# Altium PCB RockRTK.PcbDoc (part 6 of 8)
Units mm, origin at the board's own origin, x right, y up, seen from the top; angles counter-clockwise.
Board outline 128 x 72 mm, 6 copper layers (Top Layer, MidLayer1GND, MidLayer2SIG, MidLayer3PWR, MidLayer4GND, Bottom Layer), stack 1.538 mm thick; 400 components, 307 nets, 1795 pads, 1243 vias.
Unrouted connection lines stored in the file: 522.
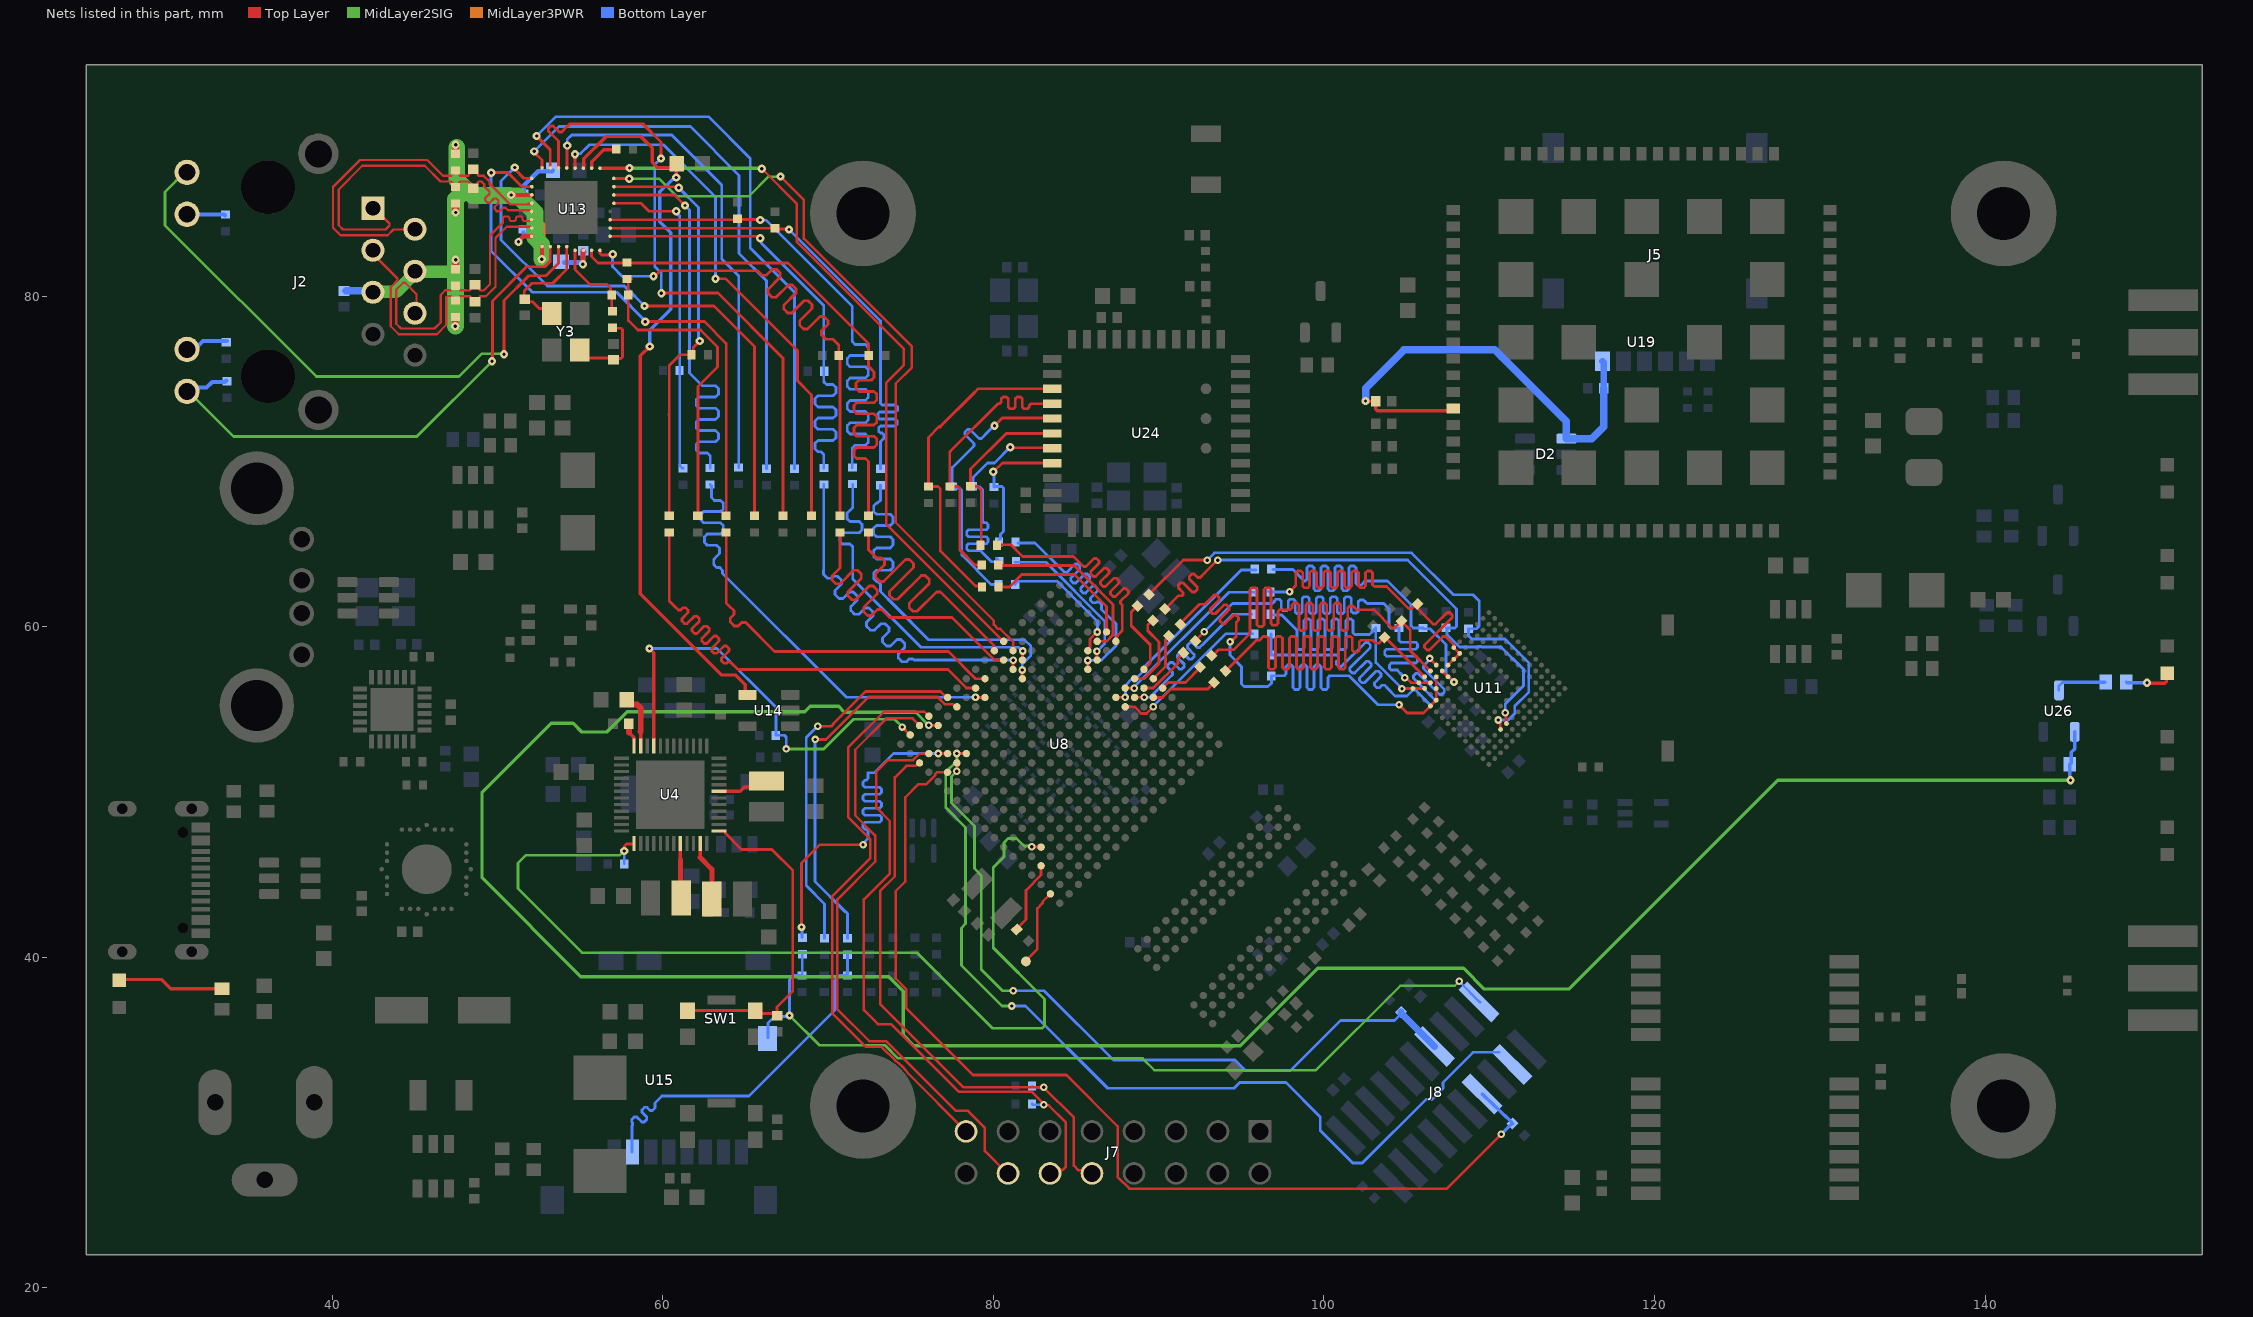
[diagram p9: the nets of this part, all layers, seen from the top]

## Via types
v1: diameter 0.5, hole 0.2, Top Layer to Bottom Layer, tented both sides, 532 vias
v2: diameter 0.457, hole 0.203, Top Layer to Bottom Layer, tented both sides, 414 vias
v3: diameter 0.5, hole 0.2, Top Layer to Bottom Layer, 233 vias
v4: diameter 0.7, hole 0.3, Top Layer to Bottom Layer, 32 vias
v5: diameter 0.457, hole 0.2, Top Layer to Bottom Layer, tented both sides, 30 vias
v6: diameter 0.7, hole 0.3, Top Layer to Bottom Layer, tented both sides, 2 vias

## Nets (pads, with @x,y where several pads share a name; then routed paths per layer and width w, separated by ;. In a path a pad name is that pad's centre, name@x,y a point inside that pad or via, vN(x,y) a via of type N, cw(c..) or ccw(c..) an arc to the next point about the centre after c; other vN are vias at no path point) (continued)
MMC0_DAT2_R: R126.1 U8.F18 | length 22.5
  Top Layer w0.169: v2(69.375,53.975) 70.198,53.975 70.34,54.118 70.34,54.14 72.275,56.075 76.802,56.075 77.162,55.715 U8.F18@77.238,55.715
  Bottom Layer w0.169: v2(69.375,53.975) 68.687,53.287 68.687,44.338 69.8,43.225 R126.1@69.8,41.15
MMC0_DAT3: R85.1 R128.2 U15.2 | length 22.3
  Bottom Layer w0.169: U15.2@58.15,28.217 58.15,29.75 58.15,29.8 58.185,29.835 58.185,29.985 58.136,30.034 58.136,30.183 58.285,30.333 58.435,30.333 58.74,30.028 58.89,30.028 59.04,30.177 59.04,30.327 58.748,30.619 58.748,30.768 58.898,30.918 59.047,30.918 59.232,30.733 59.382,30.733 59.532,30.882 59.532,31.032 59.532,31.182 59.837,31.487 59.95,31.6 65.225,31.6 70.4,36.775 70.4,38.6 70.7,38.9 R85.1@71.175,38.9 ; R85.1@71.15,39.05 R85.1@71.2,39 ; R85.1@71.175,39 R128.2@71.175,40.15
MMC0_DAT3_R: R128.1 U8.F17 | length 22.7
  Top Layer w0.169: v2(69.225,53.175) 69.875,53.175 72.45,55.75 76.64,55.75 77.09,55.3 77.577,55.3 77.728,55.15 U8.F17@77.804,55.15
  Bottom Layer w0.169: v2(69.225,53.175) 69.225,44.575 71.05,42.75 71.075,42.75 71.175,42.65 R128.1@71.175,41.15
MMC0_SDCD: J8.19 R88.1 R135.2 U15.DL | length 52.7
  MidLayer2SIG w0.152: 89.029,33.884 89.74,33.172 99.522,33.172 104.625,38.275 107.919,38.275 v2(108.181,38.537)
  MidLayer2SIG w0.169: v2(67.675,36.475) 69.479,34.671 73.457,34.671 74.244,33.884 89.029,33.884
  Bottom Layer w0.152: v2@108.131,38.587 J8.19@109.455,37.263
  Bottom Layer w0.169: U15.DL@66.375,35.125 66.38,35.13 66.38,36.03 66.77,36.42 67.62,36.42 v2(67.675,36.475) 67.675,38.65 67.925,38.9 R88.1@68.425,38.9 ; R88.1@68.45,38.85 R135.2@68.45,40.175
MMC0_SDCD_R: R135.1 U8.C15 | length 24.7
  Top Layer w0.169: v2(68.4,41.825) 68.4,45.7 69.5,46.8 v2(72.125,46.8) ; v2@76.68,52.32 U8.C15@77.246,52.32
  Bottom Layer w0.169: R135.1@68.425,41.2 v2@68.425,41.85 ; v2(72.125,46.8) 72.125,46.878 72.425,47.178 72.425,47.55 72.425,47.635 72.319,47.74 72.235,47.74 72.129,47.846 72.129,48.058 72.235,48.164 73.13,48.164 73.236,48.27 73.236,48.481 73.13,48.587 72.235,48.587 72.129,48.693 72.129,48.905 72.235,49.01 73.13,49.01 73.236,49.116 73.236,49.328 73.13,49.434 72.235,49.434 72.129,49.539 72.129,49.751 72.235,49.857 73.13,49.857 73.236,49.963 73.236,50.174 73.13,50.28 72.235,50.28 72.129,50.386 72.129,50.598 72.235,50.703 72.319,50.703 72.425,50.809 72.425,51.125 72.425,51.165 72.815,51.165 73.975,52.325 v2(76.675,52.325)
MMC1_CLK: R53.1 R138.1 U11.M6 | length 33.9
  Top Layer w0.169: R138.1@90.479,61.154 91.187,61.862 91.412,61.862 91.472,61.922 91.472,62.072 91.191,62.354 91.191,62.503 91.34,62.653 91.49,62.653 92.04,62.103 92.19,62.103 92.339,62.253 92.339,62.402 91.857,62.885 91.857,63.035 92.006,63.184 92.156,63.184 92.37,62.97 92.52,62.97 92.79,63.24 v2(93.575,64.025) ; v2(110.975,54.8) 111.023,54.752 U11.M6@111.023,54.107
  Bottom Layer w0.169: v2(93.575,64.025) 105.07,64.025 108.025,61.07 108.025,60.024 107.926,59.925 R53.1@107.4,59.925 107.455,59.87 107.455,59.52 108.2,58.775 109.352,58.775 109.371,58.794 109.515,58.794 109.534,58.775 110.725,58.775 112.075,57.425 112.075,56.425 110.975,55.325 v2(110.975,54.8)
MMC1_CLK_R: R138.2 U8.U9 | length 4.9
  Top Layer w0.169: U8.U9@88.625,56.925 88.625,56.903 88.681,56.847 89.115,56.847 90.025,57.757 90.025,59.075 89.35,59.75 89.35,60.1 R138.2@89.7,60.45
MMC1_CMD: R54.1 R136.1 U11.M5 | length 34.2
  Top Layer w0.169: R136.1@89.529,62.054 91.5,64.025 v2(92.95,64.025) ; v2(110.55,54.35) 110.55,54.272 110.67,54.152 110.67,53.837 U11.M5@110.637,53.804
  Bottom Layer w0.169: v2(92.95,64.025) 93.325,64.4 93.327,64.4 93.393,64.465 105.31,64.465 107.85,61.925 109.025,61.925 109.4,61.55 109.4,60.05 109.225,59.875 R54.1@108.75,59.875 108.75,59.45 108.95,59.25 110.95,59.25 112.4,57.8 112.4,56.05 111.55,55.2 111.55,54.752 111.157,54.36 110.683,54.36 110.666,54.342 v2@110.666,54.278 ; v2@110.644,54.369 v2@110.675,54.4
MMC1_CMD_R: R136.2 U8.V9 | length 4.7
  Top Layer w0.169: R136.2@88.815,61.36 88.35,60.895 88.35,60.05 89.5,58.9 89.5,57.795 89.18,57.475 U8.V9@89.125,57.475
MMC1_DAT0: R62.1 R121.1 U11.A3 | length 37.7
  Top Layer w0.169: R121.1@94.2,57.45 95.925,59.175 96.031,59.175 96.116,59.175 96.222,59.281 96.222,59.299 96.328,59.405 96.539,59.405 96.645,59.299 96.645,57.527 96.751,57.421 96.962,57.421 97.068,57.527 97.068,59.299 97.174,59.405 97.386,59.405 97.492,59.299 97.492,57.527 97.597,57.421 97.809,57.421 97.915,57.527 97.915,59.299 98.021,59.405 98.232,59.405 98.338,59.299 98.338,57.527 98.444,57.421 98.656,57.421 98.761,57.527 98.761,59.299 98.867,59.405 99.079,59.405 99.185,59.299 99.185,57.527 99.291,57.421 99.502,57.421 99.608,57.527 99.608,59.299 99.714,59.405 99.925,59.405 100.031,59.299 100.031,57.527 100.137,57.421 100.349,57.421 100.455,57.527 100.455,59.299 100.56,59.405 100.772,59.405 100.878,59.299 100.878,57.527 100.984,57.421 101.195,57.421 101.301,57.527 101.301,59.299 101.407,59.405 101.619,59.405 101.724,59.299 101.724,58.569 101.83,58.463 102.042,58.463 102.148,58.569 102.148,59.069 102.254,59.175 102.961,59.175 103.136,59 103.177,59 103.332,59 R62.1@103.679,59.346 103.714,59.346 U11.A3@106.097,56.964
MMC1_DAT0_R: R121.2 U8.U7 | length 4.1
  Top Layer w0.169: U8.U7@89.7,55.775 89.76,55.715 90.251,55.715 90.76,56.225 92.975,56.225 R121.2@93.375,56.625
MMC1_DAT1: R61.1 R123.1 U11.A4 | length 38.9
  Top Layer w0.169: R123.1@93.304,58.354 93.383,58.354 93.63,58.6 94.55,58.6 94.606,58.656 95.537,59.587 95.537,62.247 95.643,62.353 95.854,62.353 95.96,62.247 95.96,60.104 96.066,59.999 96.278,59.999 96.383,60.104 96.383,62.247 96.489,62.353 96.701,62.353 96.807,62.247 96.807,60.189 96.913,60.083 97.124,60.083 97.23,60.189 97.23,60.919 97.336,61.025 97.612,61.025 97.875,61.025 97.96,61.025 98.065,61.131 98.065,61.317 98.171,61.422 98.383,61.422 98.489,61.317 98.489,59.866 98.595,59.76 98.806,59.76 98.912,59.866 98.912,61.317 99.018,61.422 99.23,61.422 99.335,61.317 99.335,59.866 99.441,59.76 99.653,59.76 99.759,59.866 99.759,61.317 99.864,61.422 100.076,61.422 100.182,61.317 100.182,59.866 100.288,59.76 100.499,59.76 100.605,59.866 100.605,61.317 100.711,61.422 100.923,61.422 101.028,61.317 101.028,59.866 101.134,59.76 101.346,59.76 101.452,59.866 101.452,61.145 101.558,61.251 101.769,61.251 101.875,61.145 101.875,61.131 101.981,61.025 102.075,61.025 103.025,61.025 104.13,59.92 104.27,59.92 R61.1@104.7,60.35 104.7,60.315 105.225,59.79 105.225,58.543 106.443,57.325 U11.A4@106.45,57.325
MMC1_DAT1_R: R123.2 U8.V7 | length 2.6
  Top Layer w0.169: U8.V7@90.35,56.4 90.575,56.625 91.625,56.625 R123.2@92.525,57.525
MMC1_DAT2: R60.1 R125.1 U11.A5 | length 28.9
  Top Layer w0.169: v2(106.4,58.075) U11.A5@106.804,57.671
  Bottom Layer w0.169: R60.1@96.8,58.275 R125.1@96.8,59.55 ; R60.1@96.8,58.325 96.85,58.275 100.425,58.275 100.782,58.275 100.888,58.169 100.888,58.02 100.751,57.883 100.751,57.733 100.901,57.583 101.05,57.583 102.514,59.047 102.664,59.047 102.813,58.897 102.813,58.748 101.565,57.5 101.565,57.35 101.715,57.2 101.864,57.2 102.564,57.9 102.714,57.9 102.864,57.75 102.864,57.601 102.164,56.901 102.164,56.751 102.313,56.602 102.463,56.602 103.161,57.299 103.31,57.299 103.46,57.15 103.46,57 103.059,56.599 103.059,56.449 103.208,56.299 103.358,56.299 103.517,56.458 103.667,56.458 103.862,56.263 104.315,55.81 105.015,55.81 105.035,55.81 105.384,56.159 105.534,56.159 106.392,55.301 106.542,55.301 106.692,55.45 106.692,55.6 105.415,56.877 105.415,57.026 105.565,57.176 105.714,57.176 106.991,55.899 107.141,55.899 107.29,56.049 107.29,56.199 106.021,57.468 106.021,57.618 106.214,57.811 v2@106.453,58.05
MMC1_DAT2_R: R125.2 U8.R8 | length 9.9
  Top Layer w0.169: U8.R8@87.954,55.155 88.545,55.155 88.75,54.95 88.949,54.751 89.282,54.751 89.675,55.144 v2(89.675,55.15)
  Bottom Layer w0.169: v2(89.675,55.15) 89.675,55.175 94.075,59.575 R125.2@95.7,59.575
MMC1_DAT3: R59.1 R127.1 U11.A1 U11.B2 | length 26.6
  Top Layer w0.169: v2(104.725,56.25) 104.729,56.254 105.386,56.254 U11.A1@105.389,56.257 106.082,56.257 U11.B2@106.1,56.275
  Bottom Layer w0.169: R127.1@96.8,60.7 97.45,60.7 97.606,60.544 98.369,59.781 98.369,58.715 98.475,58.61 98.687,58.61 98.793,58.715 98.793,60.354 98.899,60.46 99.11,60.46 99.216,60.354 99.216,58.715 99.322,58.61 99.534,58.61 99.639,58.715 99.639,60.354 99.745,60.46 99.957,60.46 100.063,60.354 100.063,58.715 100.168,58.61 100.38,58.61 100.486,58.715 100.486,60.354 100.592,60.46 100.803,60.46 100.909,60.354 100.909,58.715 101.015,58.61 101.227,58.61 101.332,58.715 101.332,60.354 101.438,60.46 101.65,60.46 101.756,60.354 101.756,59.631 101.862,59.525 102.181,59.525 102.76,59.525 102.956,59.721 102.956,59.746 103.121,59.912 R59.1@103.146,59.912 103.146,57.829 104.631,56.344 104.631,56.181 v2@104.625,56.175
MMC1_DAT3_R: R127.2 U8.T8 | length 12.7
  Top Layer w0.169: U8.T8@88.554,55.73 v2@89.12,55.73
  Bottom Layer w0.169: v2(89.125,55.725) 89.475,55.725 90.782,57.032 90.842,57.092 90.842,57.242 90.557,57.527 90.557,57.676 90.707,57.826 90.856,57.826 91.257,57.426 91.406,57.426 91.556,57.576 91.556,57.725 91.156,58.125 91.156,58.275 91.305,58.425 91.455,58.425 91.855,58.024 92.005,58.024 92.155,58.174 92.155,58.324 91.754,58.724 91.754,58.874 91.904,59.023 92.054,59.023 92.339,58.738 92.488,58.738 92.737,58.987 94.5,60.75 R127.2@95.625,60.75
MMC1_DAT4: R58.1 R129.1 U11.A2 U11.B3 | length 36
  Top Layer w0.169: R129.1@92.329,59.229 92.329,59.254 v2(92.775,59.7) ; v2(104.9,56.9) 104.978,56.9 105.267,56.611 U11.A2@105.743,56.611 ; U11.A2@105.739,56.611 U11.B3@106.45,56.611 ; U11.B3@106.427,56.634 U11.B3@106.45,56.611 ; U11.B3@106.439,56.6 U11.B3@106.45,56.611
  Bottom Layer w0.169: v2(92.775,59.7) 94.475,61.4 96.81,61.4 96.895,61.4 97.001,61.506 97.001,61.546 97.106,61.651 97.318,61.651 97.424,61.546 97.424,61.064 97.53,60.958 97.741,60.958 97.847,61.064 97.847,61.554 97.953,61.66 98.165,61.66 98.27,61.554 98.27,60.883 98.376,60.777 98.588,60.777 98.694,60.883 98.694,61.703 98.8,61.809 99.011,61.809 99.117,61.703 99.117,60.883 99.223,60.777 99.435,60.777 99.54,60.883 99.54,61.703 99.646,61.809 99.858,61.809 99.964,61.703 99.964,60.883 100.069,60.777 100.281,60.777 100.387,60.883 100.387,61.703 100.493,61.809 100.704,61.809 100.81,61.703 100.81,60.883 100.916,60.777 101.128,60.777 101.234,60.883 101.234,61.703 101.339,61.809 101.551,61.809 101.657,61.703 101.657,60.927 101.763,60.821 101.974,60.821 102.08,60.927 102.08,61.506 102.186,61.612 102.398,61.612 102.503,61.506 102.609,61.4 102.75,61.4 103.625,61.4 103.95,61.075 103.95,60.025 104.075,59.9 R58.1@104.525,59.9 ; R58.1@104.546,59.912 104.546,59.425 104.546,59.166 104.652,59.06 105.562,59.06 105.668,58.955 105.668,58.743 105.562,58.637 103.789,58.637 103.683,58.531 103.683,58.32 103.789,58.214 105.562,58.214 105.668,58.108 105.668,57.896 105.562,57.791 104.079,57.791 103.973,57.685 103.973,57.473 104.079,57.367 104.44,57.367 104.546,57.261 104.546,57.254 104.623,57.177 v2(104.9,56.9)
MMC1_DAT4_R: R129.2 U8.U8 | length 3.5
  Top Layer w0.169: U8.U8@89.175,56.275 89.181,56.281 89.681,56.281 91.175,57.775 91.175,58.075 R129.2@91.575,58.475
MMC1_DAT5: R57.1 R131.1 U11.B4 U11.C3 U11.D1 U11.D2 | length 35.8
  Top Layer w0.169: R131.1@91.404,60.279 92.475,61.35 92.683,61.35 92.803,61.35 93.369,61.916 93.519,61.916 93.669,61.767 93.669,61.617 93.128,61.076 93.128,60.927 93.278,60.777 93.428,60.777 93.968,61.318 94.118,61.318 94.267,61.168 94.267,61.018 93.727,60.478 93.727,60.328 93.877,60.179 94.026,60.179 94.539,60.691 94.689,60.691 94.838,60.542 94.838,60.392 94.698,60.252 94.698,60.102 94.7,60.1 94.7,59.899 94.7,59.4 v2@94.4,59.1 ; v2(104.55,55.275) 105.045,54.78 106.034,54.78 U11.D1@106.45,55.196 U11.D2@106.804,55.55 ; U11.D2@106.8,55.525 106.804,55.529 U11.B4@106.804,56.964 ; U11.C3@106.8,56.225 U11.C3@106.804,56.229
  Bottom Layer w0.169: v2(94.325,59.075) 94.325,58.275 95.025,57.575 95.025,56.525 95.175,56.375 96.625,56.375 96.825,56.575 R57.1@96.825,57.025 97.525,57.025 97.61,57.025 97.715,57.131 97.715,57.582 97.821,57.688 98.033,57.688 98.139,57.582 98.139,56.311 98.245,56.205 98.456,56.205 98.562,56.311 98.562,57.582 98.668,57.688 98.88,57.688 98.985,57.582 98.985,56.311 99.091,56.205 99.303,56.205 99.409,56.311 99.409,57.582 99.514,57.688 99.726,57.688 99.832,57.582 99.832,56.311 99.938,56.205 100.149,56.205 100.255,56.311 100.255,56.919 100.361,57.025 100.875,57.025 ; 100.747,57.025 100.875,57.025 ; v2(104.55,55.275) 103.275,55.275 101.525,57.025 100.875,57.025
MMC1_DAT5_R: R131.2 U8.V8 | length 3.1
  Top Layer w0.169: U8.V8@89.725,56.875 89.725,56.889 90.425,57.589 90.425,59.225 R131.2@90.721,59.521
MMC1_DAT6: R56.1 R132.1 U11.B5 U11.C5 | length 26.7
  Top Layer w0.169: U11.B5@107.157,57.318 U11.C5@107.511,56.964 107.775,56.7 v2@107.8,56.7
  Bottom Layer w0.169: R132.1@96.925,63.45 98.125,63.45 98.786,62.789 98.823,62.752 98.871,62.752 98.977,62.858 98.977,63.562 99.082,63.668 99.294,63.668 99.4,63.562 99.4,62.275 99.506,62.17 99.717,62.17 99.823,62.275 99.823,63.562 99.929,63.668 100.141,63.668 100.246,63.562 100.246,62.275 100.352,62.17 100.564,62.17 100.67,62.275 100.67,63.562 100.775,63.668 100.987,63.668 101.093,63.562 101.093,62.275 101.199,62.17 101.41,62.17 101.516,62.275 101.516,63.562 101.622,63.668 101.834,63.668 101.94,63.562 101.94,62.613 102.045,62.507 102.257,62.507 102.363,62.613 102.363,62.647 102.469,62.752 103.35,62.752 103.85,62.752 105.275,61.327 105.275,60.05 105.413,59.912 R56.1@106.021,59.912 ; R56.1@105.996,59.912 106.034,59.874 106.426,59.874 107.39,58.91 107.39,57.135 v2(107.875,56.65)
MMC1_DAT6_R: R132.2 U8.R9 | length 12.2
  Top Layer w0.169: U8.R9@87.404,55.73 v2@87.97,55.73
  Bottom Layer w0.169: v2(87.975,55.725) 87.997,55.747 87.997,56.447 88.375,56.825 88.598,56.825 89.175,57.402 89.175,57.6 95,63.425 R132.2@95.9,63.425
MMC1_DAT7: R55.1 R134.1 U11.A8 U11.B6 U11.B7 U11.B8 | length 30.3
  Top Layer w0.169: v2(97.925,62.1) 98.104,62.279 98.295,62.47 98.295,63.264 98.4,63.369 98.612,63.369 98.718,63.264 98.718,62.453 98.824,62.347 99.035,62.347 99.141,62.453 99.141,63.264 99.247,63.369 99.459,63.369 99.565,63.264 99.565,62.453 99.67,62.347 99.882,62.347 99.988,62.453 99.988,63.264 100.094,63.369 100.305,63.369 100.411,63.264 100.411,62.453 100.517,62.347 100.729,62.347 100.834,62.453 100.834,63.264 100.94,63.369 101.152,63.369 101.258,63.264 101.258,62.453 101.364,62.347 101.575,62.347 101.681,62.453 101.681,63.264 101.787,63.369 101.998,63.369 102.104,63.264 102.104,62.453 102.21,62.347 102.422,62.347 102.528,62.453 102.528,63.264 102.633,63.369 102.845,63.369 102.951,63.264 102.951,62.531 103.057,62.425 103.287,62.425 103.8,62.425 105.125,61.1 105.332,61.1 R55.1@105.629,61.396 ; R55.1@105.654,61.371 105.636,61.354 105.636,61.12 106.24,60.515 106.3,60.456 106.607,60.149 106.757,60.149 107.467,60.859 107.617,60.859 107.766,60.709 107.766,60.559 106.096,58.889 106.096,58.74 106.246,58.59 106.396,58.59 107.206,59.4 107.356,59.4 107.415,59.34 107.841,58.915 107.841,58.769 U11.A8@107.864,58.746 ; U11.B6@107.511,57.671 107.839,58 U11.B7@107.875,58 ; U11.A8@107.85,58.746 U11.B8@108.218,58.378 ; U11.B7@107.864,58.025 108.189,58.35 U11.B8@108.225,58.35
  Bottom Layer w0.169: R134.1@96.625,62.15 96.675,62.1 v2(97.925,62.1)
MMC1_DAT7_R: R134.2 U8.T9 | length 10.3
  Top Layer w0.169: U8.T9@87.954,56.28 v2@88.52,56.28
  Bottom Layer w0.169: v2(88.525,56.275) 88.525,56.35 94.25,62.075 R134.2@95.775,62.075
MMC2_CLK: R111.1 R143.2 U24.17 | length 10.9
  Top Layer w0.169: R143.2@79.25,65.05 79.275,65.075 79.275,68.275 79.055,68.495 78.63,68.495 R111.1@78.625,68.5 78.625,69.525 80.786,71.686 U24.17@83.582,71.686
MMC2_CLK_R: R143.1 U8.V12 | length 17.8
  Top Layer w0.169: R143.1@80.228,64.95 81.075,64.95 81.775,64.25 84.85,64.25 85.402,63.698 85.462,63.638 85.612,63.638 86.104,64.13 86.254,64.13 86.403,63.98 86.403,63.83 85.897,63.324 85.897,63.175 86.047,63.025 86.196,63.025 86.703,63.531 86.852,63.531 87.002,63.381 87.002,63.232 86.496,62.726 86.496,62.576 86.645,62.426 86.795,62.426 87.301,62.932 87.451,62.932 87.6,62.783 87.6,62.633 87.094,62.127 87.094,61.977 87.244,61.828 87.394,61.828 87.878,62.312 88.028,62.312 88.177,62.163 88.177,62.013 87.707,61.543 87.707,61.393 87.8,61.3 87.8,61.174 87.8,59.75 87.511,59.461 87.511,59.403 87.474,59.366 87.474,59.163 U8.V12@87.42,59.11
MMC2_CMD: R112.1 R142.2 U24.16 | length 17.6
  Top Layer w0.169: v1(80.075,72.15) 80.543,72.618 83.55,72.618 U24.16@83.582,72.586
  Bottom Layer w0.169: R112.1@77.525,68.475 77.525,69.625 78.775,70.875 78.835,70.935 78.835,71.085 78.288,71.631 78.288,71.781 78.438,71.93 78.588,71.93 79.134,71.384 79.284,71.384 79.625,71.725 80.05,72.15 v1(80.075,72.15) ; R112.1@77.625,68.461 77.715,68.37 77.955,68.37 78.1,68.225 78.1,64.325 79.875,62.55 R142.2@80.325,62.55
MMC2_CMD_R: R142.1 U8.T13 | length 8.1
  Top Layer w0.169: U8.T13@85.723,58.544 85.723,58.62 85.852,58.748 85.852,59.24 v2@86.275,59.663
  Bottom Layer w0.169: R142.1@81.325,62.55 81.325,62.575 81.49,62.74 81.58,62.74 81.59,62.75 83.85,62.75 86.3,60.3 v2(86.3,59.675)
MMC2_DAT0: R116.1 R137.2 U24.18 | length 16.5
  Top Layer w0.169: v1(81.025,70.85) 81.057,70.818 83.55,70.818 U24.18@83.582,70.786
  Bottom Layer w0.169: R116.1@78.775,68.55 78.775,69.025 79.656,69.906 80.081,69.906 v1(81.025,70.85) ; R116.1@78.875,68.525 78.875,68.515 78.94,68.45 79.2,68.45 79.35,68.3 79.35,67.235 79.35,66.389 79.456,66.284 79.585,66.284 79.691,66.178 79.691,65.966 79.585,65.86 78.501,65.86 78.395,65.755 78.395,65.543 78.501,65.437 79.585,65.437 79.691,65.331 79.691,65.12 79.585,65.014 78.501,65.014 78.395,64.908 78.395,64.696 78.501,64.59 79.244,64.59 79.35,64.485 79.35,64.475 79.425,64.4 79.9,63.925 R137.2@80.375,63.925 80.375,63.95 R137.2@80.21,64.115
MMC2_DAT0_R: R137.1 U8.T12 | length 9.3
  Top Layer w0.169: U8.T12@86.27,58.08 86.282,58.092 86.282,58.493 v2(86.275,58.5)
  Bottom Layer w0.169: R137.1@81.325,63.9 83.175,63.9 86.74,60.335 86.74,58.965 v2(86.275,58.5)
MMC2_DAT1: R115.1 R139.2 U24.19 | length 8.7
  Top Layer w0.169: v1(80,69.375) 80.026,69.375 80.559,69.907 83.561,69.907 U24.19@83.582,69.886
  Bottom Layer w0.169: v1(80,69.375) 80.047,69.328 R115.1@80.047,68.453 ; R115.1@80.05,68.45 80.071,68.471 80.523,68.471 80.622,68.372 80.622,67.55 80.622,65.771 80.465,65.613 80.447,65.596 80.447,65.315 80.332,65.2 R139.2@80.3,65.2
MMC2_DAT1_R: R139.1 U8.R12 | length 16.9
  Top Layer w0.169: v2(85.725,57.95) v2(85.725,57.95) U8.R12@85.724,57.413 ; U8.R12@85.723,57.412 U8.R12@85.724,57.413
  Bottom Layer w0.169: R139.1@81.494,65.066 82.527,65.066 84.242,63.352 84.301,63.292 84.451,63.292 84.939,63.78 85.089,63.78 85.239,63.631 85.239,63.481 84.693,62.935 84.693,62.786 84.843,62.636 84.992,62.636 85.538,63.182 85.688,63.182 85.837,63.032 85.837,62.882 85.292,62.337 85.292,62.187 85.441,62.037 85.591,62.037 86.016,62.462 86.166,62.462 86.315,62.313 86.315,62.163 85.89,61.738 85.89,61.588 86.04,61.439 86.189,61.439 86.247,61.496 86.397,61.496 86.546,61.347 86.546,61.197 86.546,61.047 86.732,60.862 87.422,60.171 87.422,58.846 86.547,57.971 85.746,57.971 v2(85.725,57.95)
MMC2_DAT2: R114.1 R140.2 U24.14 | length 19.7
  Top Layer w0.169: 76.725,72.1 76.075,71.45 R114.1@76.075,68.475 76.65,68.475 76.8,68.325 76.8,64.575 78.92,62.455 79.314,62.455 R140.2@79.393,62.375 ; 76.763,72.063 76.887,72.187 78.758,74.058 79.086,74.386 U24.14@83.582,74.386
MMC2_DAT2_R: R140.1 U8.V13 | length 9.2
  Top Layer w0.169: R140.1@80.325,62.4 80.975,62.4 81.725,63.15 84.925,63.15 86.854,61.221 U8.V13@86.854,59.675
MMC2_DAT3: R113.1 R141.2 U24.15 | length 17.8
  Top Layer w0.169: 77.425,70.625 77.375,70.575 R113.1@77.375,68.475 77.876,68.475 77.975,68.376 77.975,64.65 78.895,63.73 79.293,63.73 R141.2@79.323,63.7 ; 77.45,70.651 80.286,73.486 80.292,73.486 80.376,73.486 80.482,73.592 80.482,73.786 80.588,73.892 80.799,73.892 80.905,73.786 80.905,73.284 81.011,73.178 81.223,73.178 81.329,73.284 81.329,73.786 81.434,73.892 81.646,73.892 81.752,73.786 81.752,73.284 81.858,73.178 82.069,73.178 82.175,73.284 82.175,73.381 82.281,73.486 82.8,73.486 U24.15@83.582,73.486
MMC2_DAT3_R: R141.1 U8.U13 | length 10.9
  Top Layer w0.169: R141.1@80.322,63.7 84.9,63.7 87.253,61.347 87.253,59.51 86.852,59.11 U8.U13@86.289,59.11
MPU_MON: TP1.1 U8.A2 | length 4.7
  Top Layer w0.152: TP1.1@81.975,39.8 82.054,39.8 82.111,39.857 82.111,39.936 82.665,40.49 82.665,42.954 82.982,43.271 82.982,43.357 U8.A2@83.46,43.836
PHY_COL: R75.1 R154.1 U13.15 | length 25.5
  Top Layer w0.169: U13.15@57.049,86.613 60.912,86.613 v1(60.975,86.55) ; 60.375,72.825 60.4,72.8 ; R154.1@60.4,66.7 60.4,72.8 ; 60.4,75.225 60.4,75.15 ; R75.1@61.675,76.45 61.05,76.45 60.4,75.8 60.4,75.15 ; R75.1@61.75,76.45 61.855,76.555 61.855,76.88 v1(62.25,77.275) ; 60.4,72.8 60.4,75.15
  Bottom Layer w0.169: v1(60.975,86.55) 62.175,85.35 v1@62.175,77.275
PHY_CRS: R155.1 U13.14 | length 28.1
  Top Layer w0.169: U13.14@57.049,86.113 60.712,86.113 v1(61.35,85.475)
  Bottom Layer w0.169: v1(61.35,85.475) 61.625,85.2 61.625,75.35 62.32,74.655 62.404,74.571 63.205,74.571 63.374,74.401 63.374,74.063 63.205,73.893 62.2,73.893 62.03,73.724 62.03,73.385 62.2,73.216 63.205,73.216 63.374,73.047 63.374,72.708 63.205,72.539 62.2,72.539 62.03,72.369 62.03,72.031 62.2,71.861 63.205,71.861 63.374,71.692 63.374,71.353 63.205,71.184 62.2,71.184 62.03,71.015 62.03,70.676 62.2,70.507 62.706,70.507 62.875,70.337 62.875,70.111 R155.1@62.875,69.6
PHY_LED1: J2.9 U13.3 | length 37.2
  Top Layer w0.169: v1(50.4,76.475) 50.4,79.725 51.9,81.225 52.95,81.225 53.704,81.979 U13.3@53.704,82.993
  MidLayer2SIG w0.169: J2.9@31.175,87.575 29.9,86.3 29.9,84.275 39.05,75.125 47.675,75.125 49.062,76.512 50.363,76.512 v1(50.4,76.475)
PHY_LED1_C: J2.10 R68.2 | length 2.2
  Bottom Layer w0.254: J2.10@31.325,84.925 33.475,84.925 R68.2@33.525,84.875
PHY_LED2: J2.12 R70.2 U13.2 | length 32.6
  Top Layer w0.169: v1(49.675,76.05) 49.7,76.075 49.7,79.7 51.769,81.769 52.872,81.769 53.204,82.101 U13.2@53.204,82.993
  MidLayer2SIG w0.169: J2.12@31.475,73.8 31.74,73.8 34.04,71.5 45.125,71.5 v1(49.675,76.05)
  Bottom Layer w0.254: J2.12@31.325,74.215 31.569,74.459 32.409,74.459 32.75,74.8 33.525,74.8 R70.2@33.6,74.875
PHY_LED2_C: J2.11 R69.2 | length 2.5
  Bottom Layer w0.254: J2.11@31.325,76.755 31.67,76.755 32.19,77.275 R69.2@33.625,77.275
PHY_MDC: U8.M18 U13.17 | length 45.3
  Top Layer w0.152: v1(66,87.7) 68.125,85.575 68.125,83.275 74.578,76.822 74.578,75.803 73.525,74.75 73.525,66.216 U8.M18@80.632,59.11
  Top Layer w0.203: U13.17@56.224,87.725 57.975,87.725 v1(58,87.75)
  MidLayer2SIG w0.203: v1(58,87.75) 58.025,87.725 65.975,87.725 v1(66,87.7)
PHY_MDIO: U8.M17 U13.16 | length 46.4
  Top Layer w0.152: v1(67.125,87.225) 68.55,85.8 68.55,83.475 75.075,76.95 75.075,75.675 74.1,74.7 74.1,66.3 80.043,60.357 80.043,60.121 80.296,59.868 80.425,59.868 81.198,59.096 U8.M17@81.198,58.544
  Top Layer w0.203: U13.16@57.049,87.113 57.052,87.11 57.965,87.11 v1(57.975,87.1)
  MidLayer2SIG w0.152: v1@57.975,87 58.075,87.1 59.784,87.1 60.837,86.047 65.238,86.047 66.416,87.225 v1(67.125,87.225)
PHY_RBIAS: R80.2 U13.32 | length 1.6
  Top Layer w0.254: v1@51.325,83.35 51.588,83.613 U13.32@52.072,83.613
  Bottom Layer w0.254: v1(51.275,83.275) 51.275,83.342 51.575,83.642 R80.2@51.575,83.85
PHY_REFCLK: R71.2 R72.2 R159.1 | length 19.5
  Top Layer w0.169: R71.2@57.85,81.025 57.85,80.935 57.925,80.86 57.925,78.525 58.5,77.95 62.3,77.95 63.325,76.925 63.325,75.7 62.146,74.521 62.146,66.725 R159.1@62.121,66.7 ; R71.2@57.983,80.892 58.115,81.025 R71.2@58.125,81.025
PHY_RSTN: C127.1 U13.19 U14.4 | length 44.7
  Top Layer w0.203: 55.225,87.875 55.225,88.3 56.575,89.65 58.675,89.65 59.369,88.956 59.369,88.106 59.704,87.771 59.998,87.771 60.002,87.775 60.625,87.775 C127.1@60.788,87.938 ; v1@59.25,76.975 58.65,76.375 58.65,61.975 63.55,57.075 64.4,57.075 65,56.475 65,56 U14.4@65.125,55.875 ; v1(60.825,87.175) C127.1@60.825,87.9
  Bottom Layer w0.203: v1(59.225,76.95) 59.225,77.928 60.5,79.203 60.5,83.825 59.825,84.5 59.825,86.3 60.573,87.048 60.618,87.048 60.745,87.175 v1(60.825,87.175)
PHY_RXCLK: R71.1 R76.2 R156.1 U13.7 | length 38.4
  Top Layer w0.169: U13.7@55.704,82.768 55.704,82.396 56.1,82 67.575,82 72.45,77.125 72.45,75.894 72.45,75.751 72.619,75.581 72.789,75.412 72.789,75.073 72.619,74.904 71.874,74.904 71.704,74.735 71.704,74.396 71.874,74.227 72.788,74.227 72.957,74.057 72.957,73.719 72.788,73.549 71.743,73.549 71.574,73.38 71.574,73.041 71.743,72.872 72.788,72.872 72.957,72.703 72.957,72.364 72.788,72.195 71.743,72.195 71.574,72.026 71.574,71.687 71.743,71.518 72.788,71.518 72.957,71.348 72.957,71.01 72.788,70.84 71.743,70.84 71.574,70.671 71.574,70.332 71.743,70.163 72.281,70.163 72.45,69.994 72.45,69.909 R156.1@72.45,66.7
PHY_RXD0: R73.1 R144.1 U13.11 | length 36.6
  Top Layer w0.169: U13.11@56.824,84.613 56.83,84.619 64.525,84.619 64.544,84.638 65.862,84.638 v1(65.9,84.6)
  Bottom Layer w0.169: v1(65.9,84.6) 65.912,84.588 66.262,84.588 71.475,79.375 71.475,77.427 71.475,77.24 71.644,77.07 72.264,77.07 72.433,76.901 72.433,76.562 72.264,76.393 71.343,76.393 71.174,76.224 71.174,75.885 71.343,75.716 72.264,75.716 72.433,75.546 72.433,75.208 72.264,75.038 71.343,75.038 71.174,74.869 71.174,74.53 71.343,74.361 72.264,74.361 72.433,74.192 72.433,73.853 72.264,73.684 71.343,73.684 71.174,73.514 71.174,73.176 71.343,73.007 72.264,73.007 72.433,72.837 72.433,72.499 72.264,72.329 71.343,72.329 71.174,72.16 71.174,71.821 71.343,71.652 72.264,71.652 72.433,71.483 72.433,71.144 72.264,70.975 71.644,70.975 71.475,70.805 71.475,70.043 R144.1@71.475,69.625
PHY_RXD1: R74.1 R145.1 U13.10 | length 31.9
  Top Layer w0.169: U13.10@56.824,84.113 56.833,84.104 56.866,84.104 56.87,84.1 R74.1@66.8,84.1 ; R74.1@66.8,83.922 66.941,84.063 67.612,84.063 v1(67.65,84.025)
  Bottom Layer w0.169: v1(67.65,84.025) 70.344,81.331 73.175,78.5 73.175,73.6 73.175,73.515 73.281,73.41 74.094,73.41 74.2,73.304 74.2,73.092 74.094,72.986 73.128,72.986 73.022,72.88 73.022,72.669 73.128,72.563 74.069,72.563 74.174,72.457 74.174,72.245 74.069,72.14 73.175,72.14 73.069,72.034 73.069,71.822 73.175,71.716 73.281,71.716 73.387,71.611 73.387,71.399 73.281,71.293 73.175,71.187 73.175,70.282 R145.1@73.175,69.55
PHY_RXD2: R77.2 R146.1 U13.9 | length 30.8
  Top Layer w0.169: U13.9@56.824,83.613 65.66,83.613 65.71,83.563 65.837,83.563 v1(65.9,83.5)
  Bottom Layer w0.169: v1(65.9,83.5) 65.963,83.437 65.963,83.212 69.75,79.425 69.75,75.45 69.75,74.9 69.75,74.815 69.919,74.646 70.312,74.646 70.481,74.477 70.481,74.138 70.312,73.969 69.394,73.969 69.225,73.799 69.225,73.461 69.394,73.291 70.312,73.291 70.481,73.122 70.481,72.783 70.312,72.614 69.394,72.614 69.225,72.445 69.225,72.106 69.394,71.937 70.312,71.937 70.481,71.768 70.481,71.429 70.312,71.26 69.394,71.26 69.225,71.09 69.225,70.752 69.394,70.582 69.581,70.582 69.75,70.413 69.75,70.225 R146.1@69.75,69.6
PHY_RXD3: R78.2 R147.1 U13.8 | length 36.7
  Top Layer w0.169: U13.8@56.204,82.768 56.204,82.58 56.303,82.481 56.931,82.481 v1(56.975,82.525) ; v1(59.45,81.2) 59.513,81.2 59.838,81.525 65.75,81.525 65.964,81.311 66.024,81.251 66.264,81.251 66.635,81.622 66.875,81.622 67.114,81.383 67.114,81.143 66.375,80.404 66.375,80.164 66.614,79.925 66.854,79.925 67.603,80.675 67.843,80.675 68.082,80.435 68.082,80.196 67.333,79.446 67.333,79.207 67.572,78.967 67.812,78.967 68.561,79.717 68.801,79.717 69.04,79.477 69.04,79.238 68.29,78.488 68.29,78.249 68.53,78.009 68.769,78.009 69.519,78.759 69.758,78.759 69.998,78.519 69.998,78.28 69.616,77.898 69.616,77.659 69.887,77.388 70.312,77.388 70.65,77.05 R78.2@70.65,76.4 ; R147.1@70.729,66.7 R78.2@70.729,76.546
  Bottom Layer w0.169: v1(56.975,82.525) 56.975,81.775 57.55,81.2 v1(59.45,81.2)
PHY_RXDV: R157.1 U13.26 | length 34.5
  Top Layer w0.169: v1(49.625,87.45) 49.65,87.475 50.632,87.475 51.494,86.613 U13.26@52.084,86.613 ; v1(58.95,78.45) 62.525,78.45 63.843,77.132 63.843,74.082 R157.1@63.843,66.7
  Bottom Layer w0.169: v1(49.625,87.45) 49.625,82.725 52.125,80.225 57.225,80.225 58.95,78.5 v1(58.95,78.45)
PHY_RXER: R79.2 R158.1 U13.13 | length 19.7
  Top Layer w0.169: U13.13@57.049,85.613 58.687,85.613 59.175,85.125 v1(60.825,85.125)
  Bottom Layer w0.169: v1(60.825,85.125) 60.825,85.036 61.035,84.826 61.035,69.74 61.2,69.575 R158.1@61.225,69.575
PHY_TXCLK: R152.1 U13.20 | length 32.9
  Top Layer w0.169: v1(54.7,88.575) 54.702,88.573 54.702,87.735 U13.20@54.704,87.733 ; v1(63.2,81.05) 63.8,81.05 68.15,76.7 68.15,74.875 69.007,74.018 R152.1@69.007,66.7
  Bottom Layer w0.169: v1(54.7,88.575) 54.737,88.612 55.037,88.612 55.575,89.15 60.05,89.15 63.2,86 v1(63.2,81.05)
PHY_TXD0: R148.1 U13.22 | length 38.4
  Top Layer w0.169: U13.22@53.704,87.745 53.702,87.747 53.702,88.723 53.702,89.248 53.702,89.368 53.077,89.992 53.077,90.142 53.227,90.292 53.377,90.292 53.747,89.921 53.896,89.921 54.012,90.037 54.4,90.425 58.8,90.425 59.9,89.325 v1(59.9,88.325) ; v1(59.925,80.175) 63.35,80.175 67.286,76.239 67.286,73.739 R148.1@67.286,66.7
  Bottom Layer w0.169: v1(59.9,88.325) 59.525,87.95 59.525,81.778 59.912,81.391 59.912,80.94 59.912,80.188 v1(59.925,80.175)
PHY_TXD1: R149.1 U13.23 | length 36.6
  Top Layer w0.169: v1(52.375,89.675) 52.625,89.425 53.204,88.846 U13.23@53.204,87.745
  Bottom Layer w0.169: v1(52.375,89.675) 53.55,90.85 62.775,90.85 65.3,88.325 65.3,82.9 67.975,80.225 R149.1@67.975,69.55
PHY_TXD2: R150.1 U13.24 | length 33.9
  Top Layer w0.169: v1(52.225,88.75) 52.225,88.697 52.704,88.218 U13.24@52.704,87.745
  Bottom Layer w0.169: v1(52.225,88.75) 53.725,90.25 61.675,90.25 64.625,87.3 64.625,82.575 66.275,80.925 R150.1@66.275,69.55
PHY_TXD3: R151.1 U13.25 | length 34.2
  Top Layer w0.169: v1(51.05,87.775) 51.05,87.686 51.357,87.379 51.357,87.368 51.6,87.125 51.925,87.125 ; v1(58.9,79.4) 63.1,79.4 65.564,76.936 R151.1@65.564,66.7
  Bottom Layer w0.169: v1(51.05,87.775) 50.225,86.95 50.225,83.4 53.025,80.6 57.701,80.6 57.8,80.501 v1(58.9,79.4)
PHY_TXD4: R81.2 U13.18 | length 2.2
  Top Layer w0.203: U13.18@55.704,87.733 55.707,87.735 55.707,88.132 56.425,88.85 R81.2@57.2,88.85
PHY_TXEN: R153.1 U13.21 | length 30
  Top Layer w0.169: U13.21@54.204,87.745 54.213,87.754 54.213,89.088 v1(54.225,89.1)
  Bottom Layer w0.169: v1(54.225,89.1) 54.225,89.475 54.5,89.75 60.55,89.75 63.575,86.725 63.575,82.25 64.6,81.225 R153.1@64.6,69.625
PHY_VDDA: C115.1 C116.1 C123.1 FB1.2 J2.4 J2.5 R63.2 R64.2 R65.2 R66.2 U13.1 U13.27 | length 38.5
  Top Layer w0.254: v1(50.837,86.113) U13.27@52.084,86.113 ; v1@52.704,82.207 U13.1@52.704,82.993
  Top Layer w0.406: v1@47.447,78.177 R65.2@47.447,78.728 ; v1@47.473,85.052 R63.2@47.473,85.603 ; R66.2@47.477,81.647 v1@47.477,82.198 ; R64.2@47.477,88.597 v1@47.477,89.148
  MidLayer2SIG w0.406: J2.5@42.675,80.15 J2.5@42.774,80.249
  MidLayer2SIG w0.762: J2.5@42.774,80.249 43.884,80.249 J2.4@45.115,81.48 ; J2.4@45.255,81.48 47.475,81.48
  MidLayer2SIG w1.016: v1@47.475,78.175 47.475,81.48 v1(47.475,82.2) v1@47.475,84.95 ; v1(47.475,85.05) 47.475,85.85 48.1,86.475 ; v1@47.55,89 47.55,87.025 48.1,86.475 ; v1@50.75,86.075 48.5,86.075 48.1,86.475 ; v1@50.909,86.066 51.259,86.066 52.275,85.05 52.275,83.527 52.68,83.121 v1(52.68,82.23)
  MidLayer3PWR w0.457: v1@50.875,86.075 52.68,84.27 v1(52.68,82.23)
  Bottom Layer w0.254: C123.1@40.725,80.305 C123.1@40.822,80.208 ; C115.1@51.6,86.125 51.6,86.675 52.475,87.55 53.325,87.55 FB1.2@53.375,87.6 ; C116.1@52.575,82.9 52.653,82.822 52.653,82.258 v1(52.68,82.23) ; C116.1@52.663,82.88 C116.1@52.699,82.915
  Bottom Layer w0.406: v1(50.837,86.113) C115.1@51.604,86.113
  Bottom Layer w0.457: C123.1@40.847,80.308 J2.5@42.143,80.308
  other v1: 47.45,78.175 47.475,89.15
PHY_VDDCR: C117.1 C118.1 U13.6 | length 2.8
  Top Layer w0.169: v1(55.175,81.925) v1@55.195,81.945 ; U13.6@55.195,82.759 U13.6@55.204,82.768
  Top Layer w0.305: v1@55.195,81.945 U13.6@55.195,82.759
  Bottom Layer w0.305: C117.1@54.05,82.025 55.022,82.025 55.122,81.925 v1(55.175,81.925) 55.187,81.937 55.187,82.612 C118.1@55.25,82.675
PHY_XTAL1: C125.2 R67.2 Y3.1 | length 5.8
  Top Layer w0.169: Y3.1@54.989,76.736 55.475,76.25 56.82,76.25 C125.2@56.942,76.128 ; C125.2@56.861,76.048 C125.2@56.942,76.128 ; R67.2@56.861,78.054 57.476,78.054 57.575,77.955 57.575,76.324 57.476,76.225 57.133,76.225 C125.2@56.989,76.081 ; C125.2@57.025,76.045 C125.2@56.942,76.128 ; C125.2@57.133,76.32 57.085,76.272 C125.2@56.942,76.128
PHY_XTAL1/CLKIN: R67.1 R72.1 U13.5 | length 5.2
  Top Layer w0.169: U13.5@54.704,82.768 54.704,81.596 55.6,80.7 56.625,80.7 56.845,80.48 56.845,80.13 R72.1@56.925,80.05 ; R72.1@56.9,79.975 56.925,79.95 56.925,79.125 R67.1@56.975,79.075
PHY_XTAL2: C126.2 U13.4 Y3.3 | length 7.1
  Top Layer w0.169: C126.2@51.601,79.85 51.801,79.65 52.125,79.65 52.534,79.241 52.984,79.241 Y3.3@53.289,78.936 ; C126.2@51.629,79.805 51.629,80.312 52.091,80.775 53.35,80.775 54.204,81.629 U13.4@54.204,82.993
PMIC_BYPASS: C10.1 U4.47 | length 3.4
  Top Layer w0.203: U4.47@58.67,52.784 58.67,53.645
  Top Layer w0.356: C10.1@57.825,55.575 57.825,55.55 58.097,55.278 58.467,55.278 58.675,55.069 58.675,53.65 58.67,53.645
PMIC_INT_LDO: C9.1 U4.48 | length 1.5
  Top Layer w0.203: 57.955,53.595 58.269,53.281 58.269,52.786 U4.48@58.27,52.784
  Top Layer w0.356: 57.955,53.595 C9.1@57.955,54.125
PMIC_L1: L1.1 U4.20 | length 3.3
  Top Layer w0.203: 61.07,45.905 U4.20@61.07,46.884
  Top Layer w0.305: 61.07,45.905 61.07,43.63 L1.1@61.125,43.575
PMIC_L2: L2.1 U4.23 | length 3.7
  Top Layer w0.203: 62.27,46.03 U4.23@62.27,46.884
  Top Layer w0.305: 62.27,46.03 62.973,45.327 L2.1@62.973,43.525
PMIC_L3: L3.1 U4.31 | length 3.1
  Top Layer w0.203: U4.31@63.42,50.034 64.684,50.034 64.75,50.1 64.882,50.232 64.948,50.298 65.922,50.298 L3.1@66.275,50.651
PMIC_LED: LED1.1 R3.1 | length 6.5
  Top Layer w0.203: LED1.1@27.125,38.613 27.162,38.65 29.7,38.65 30.25,38.1 R3.1@33.35,38.1
PMIC_PWR_BUT: C23.1 SW1.1 SW1.2 U4.25 | length 20.3
  Top Layer w0.169: SW1.1@61.5,36.775 SW1.2@65.625,36.775 ; U4.25@63.42,47.634 63.77,47.634 63.785,47.619 63.785,47.508 64.769,46.525 66.6,46.525 67.875,45.25 67.875,37.95 66.925,37 66.925,36.6 C23.1@66.925,36.455 ; SW1.2@65.6,36.775 65.775,36.6 C23.1@66.975,36.6
RJ45_RX_N: C119.1 J2.6 R66.1 U13.30 | length 20.1
  Top Layer w0.138: J2.6@45.115,78.94 45.115,80.11 44.422,80.803 44.307,80.803 43.891,80.387 43.891,78.316 44.173,78.034 46.202,78.034 46.571,78.404 46.571,80.065 46.852,80.346 47.188,80.346 47.269,80.426 47.269,80.444 47.45,80.625 R66.1@47.475,80.625 47.5,80.625 47.681,80.444 47.681,80.426 47.762,80.346 48.098,80.346 48.108,80.336 48.318,80.336 48.399,80.416 48.399,80.454 48.62,80.675 C119.1@48.65,80.675 48.68,80.675 48.901,80.454 48.901,80.416 48.982,80.336 49.177,80.336 49.55,80.709 49.55,83.656 50.276,84.381 50.345,84.45 50.345,84.739 50.423,84.817 50.658,84.817 50.737,84.739 50.737,84.612 50.815,84.533 51.05,84.533 51.128,84.612 51.128,84.739 51.207,84.817 51.442,84.817 51.52,84.739 51.52,84.614 51.601,84.533 51.7,84.533 51.971,84.533 52.051,84.613 U13.30@52.072,84.613
RJ45_RX_P: C120.1 J2.3 R65.1 U13.31 | length 20.1
  Top Layer w0.138: J2.3@42.475,82.77 42.475,82.55 43.966,81.059 43.966,80.944 43.55,80.528 43.55,78.175 44.032,77.693 46.343,77.693 46.912,78.262 46.912,79.924 46.993,80.004 47.188,80.004 47.269,79.924 47.269,79.906 47.45,79.725 R65.1@47.475,79.725 47.5,79.725 47.681,79.906 47.681,79.924 47.762,80.004 47.957,80.004 47.967,79.994 48.318,79.994 48.399,79.914 48.399,79.876 48.62,79.655 C120.1@48.65,79.655 48.68,79.655 48.901,79.876 48.901,79.914 48.982,79.994 49.318,79.994 49.387,80.063 49.891,80.567 49.891,83.514 50.451,84.074 50.569,84.192 51.971,84.192 52.051,84.113 U13.31@52.072,84.113
RJ45_TX_N: C121.1 J2.2 R64.1 U13.28 | length 22.8
  Top Layer w0.138: J2.2@45.046,84.02 45.115,84.02 45.107,84.028 43.722,84.028 43.372,83.678 40.515,83.678 40.334,83.859 40.059,84.134 40.059,86.591 41.693,88.225 45.753,88.225 46.707,87.271 47.188,87.271 47.269,87.351 47.269,87.419 47.45,87.6 R64.1@47.475,87.6 47.5,87.6 47.681,87.419 47.681,87.351 47.762,87.271 48.098,87.271 48.101,87.268 48.218,87.268 48.299,87.349 48.299,87.444 48.52,87.665 C121.1@48.55,87.665 ; C121.1@48.58,87.665 48.801,87.444 48.801,87.349 48.882,87.268 49.176,87.268 49.549,86.895 49.549,86.77 50.783,85.536 51.986,85.536 52.063,85.613 U13.28@52.084,85.613 52.069,85.598 51.898,85.598 51.891,85.591
RJ45_TX_P: C122.1 J2.1 R63.1 U13.29 | length 22.8
  Top Layer w0.138: J2.1@42.575,85.29 43.481,84.384 43.481,84.269 43.231,84.019 40.656,84.019 40.4,84.275 40.4,86.45 41.834,87.884 45.612,87.884 46.566,86.929 47.188,86.929 47.269,86.849 47.269,86.781 47.45,86.6 R63.1@47.475,86.6 47.5,86.6 47.681,86.781 47.681,86.849 47.762,86.929 47.957,86.929 47.959,86.927 48.218,86.927 48.299,86.846 48.299,86.751 48.52,86.53 C122.1@48.55,86.53 ; C122.1@48.58,86.53 48.801,86.751 48.801,86.846 48.882,86.927 49.035,86.927 49.208,86.754 49.208,86.658 49.208,86.629 49.242,86.595 49.519,86.317 49.519,86.179 49.266,85.926 49.266,85.787 49.405,85.649 49.543,85.649 49.797,85.902 49.935,85.902 50.074,85.763 50.074,85.625 49.847,85.397 49.847,85.259 49.985,85.12 50.124,85.12 50.351,85.347 50.489,85.347 50.496,85.34 50.545,85.292 50.642,85.195 51.969,85.195 52.051,85.113 U13.29@52.072,85.113
SIM_VDD: C144.1 C145.1 D2.1 J5.C1 U19.30 | length 29.1
  Top Layer w0.152: v1@102.575,73.625 102.588,73.638 C144.1@103.145,73.638 ; U19.30@107.67,73.05 U19.30@107.825,73.205
  Top Layer w0.203: C144.1@103.145,73.638 103.145,73.139 103.234,73.05 U19.30@107.67,73.05
  Bottom Layer w0.406: J5.C1@116.863,76.057 116.93,75.99 C145.1@116.93,74.425
  Bottom Layer w0.457: v1(102.525,73.65) 102.525,74.425 104.85,76.75 110.35,76.75 114.676,72.424 D2.1@114.676,71.375 116.2,71.375 116.93,72.105 C145.1@116.93,74.425
SOC_CLKOUT2: J8.18 U8.D14 | length 55.6
  Top Layer w0.169: v2(77.8,52.325) 77.802,52.323 78.367,52.323 U8.D14@78.369,52.321
  MidLayer2SIG w0.169: v2(77.8,52.325) 77.8,51.875 77.125,51.2 77.125,49.05 78.33,47.845 78.33,42.03 78.075,41.775 78.075,39.5 80.525,37.05 v2(81.125,37.05)
  Bottom Layer w0.169: v2@77.765,52.29 v2(77.8,52.325) ; v2(81.125,37.05) 81.95,37.05 86.93,32.07 94.57,32.07 94.915,32.415 97.71,32.415 99.785,30.34 99.785,29.515 101.75,27.55 102.325,27.55 106.175,31.4 106.548,31.4 107.2,32.052 107.2,32.425 109.021,34.246 110.596,34.246 J8.18@110.6,34.25
SOC_EMU0: J8.13 R166.1 U8.C14 | length 45.8
  Top Layer w0.169: v2(77.8,51.25) 77.802,51.252 77.802,51.742 U8.C14@77.81,51.75
  MidLayer2SIG w0.169: v2(77.8,51.25) 77.475,50.925 77.475,49.325 78.86,47.94 78.86,45.365 79.275,44.95 79.275,39.25 80.55,37.975 v2(81.2,37.975)
  Bottom Layer w0.169: v2(81.2,37.975) 83.075,37.975 87.275,33.775 94.625,33.775 95.25,33.15 97.975,33.15 101,36.175 104.275,36.175 R166.1@104.75,36.65
  Bottom Layer w0.406: R166.1@104.679,36.696 104.674,36.692 104.674,36.626 J8.13@106.697,34.603
SOC_EMU1: J8.14 R167.1 U8.B14 | length 63.6
  Top Layer w0.152: U8.B14@77.238,51.19 76.586,51.19 76.497,51.101 76.497,51.028 75.927,50.459 75.459,50.459 74.675,49.675 74.675,44.575 74.1,44 74.1,38.7 74.75,38.05 74.75,36.9 78.775,32.875 84.425,32.875 87.525,29.775 87.525,26.713 88.238,26 107.45,26 v2@110.75,29.3
  Bottom Layer w0.203: J8.14@109.575,31.725 R167.1@111.371,30.004 ; v2(110.725,29.3) 111.354,29.929 R167.1@111.421,29.929
SOC_EXT_WAKEUP: R13.1 U4.13 U8.C5 | length 60.6
  Top Layer w0.169: v1@57.675,46.4 57.7,46.425 57.7,46.725 57.825,46.85 58.255,46.85 58.27,46.865 U4.13@58.27,46.884 ; v2(82.325,46.675) 82.33,46.67 82.889,46.67 U8.C5@82.895,46.664
  MidLayer2SIG w0.169: v1(57.675,46.425) 57.66,46.425 57.41,46.175 51.725,46.175 51.25,45.7 51.25,44.15 55.125,40.275 75.375,40.275 79.95,35.7 82.95,35.7 83.1,35.85 83.1,37.475 80,40.575 80,45.425 80.65,46.075 80.65,46.925 80.9,47.175 81.409,47.175 81.853,46.73 82.27,46.73 v2(82.325,46.675)
  Bottom Layer w0.169: R13.1@57.675,45.65 v1(57.675,46.425)
SOC_EXTINTN: R12.1 U4.45 U8.B18 | length 27.1
  Top Layer w0.169: v2@74.494,53.934 U8.B18@74.975,53.453
  Top Layer w0.2: v5(59.2,58.675) 59.224,58.675 59.47,58.429 59.47,54.649
  Top Layer w0.203: U4.45@59.47,52.784 59.47,54.649
  MidLayer2SIG w0.169: v5(67.475,52.6) 69.75,52.6 71.55,54.4 74.025,54.4 v2(74.5,53.925)
  Bottom Layer w0.169: v5(59.2,58.675) 59.203,58.678 63.297,58.678 66.85,55.125 R12.1@66.85,53.425 67.354,53.425 ; v5(67.475,52.6) 67.475,53.304 ; 67.354,53.425 67.376,53.425 67.475,53.326 67.475,53.304 ; 67.354,53.425 67.475,53.304
SOC_GPIO0_7: J7.14 U8.C18 | length 37.2
  Top Layer w0.152: U8.C18@75.541,54.018 75.116,54.443 73.543,54.443 71.65,52.55 71.65,48.575 72.85,47.375 72.85,45.775 70.575,43.5 70.575,36.85 72.5,34.925 73.525,34.925 77.75,30.7 78.475,30.7 79.5,29.675 79.5,28.275 J7.14@80.875,26.9
SOC_GPIO0_12: J7.15 U8.D18 | length 34.5
  Top Layer w0.152: U8.D18@76.106,54.584 75.841,54.85 73.4,54.85 71.225,52.675 71.225,48.475 72.557,47.143 72.557,45.982 70.25,43.675 70.25,36.625 72.3,34.575 73.245,34.575 74.079,33.741 cw(c72.127,31) 74.868,32.952 J7.15@78.355,29.465
SOC_I2C1_SCL: J7.10 R163.1 U8.A16 | length 34.9
  Top Layer w0.152: U8.A16@75.541,51.756 75.483,51.756 75.303,51.575 74.75,51.575 74.05,50.875 74.05,44.9 73.175,44.025 73.175,37.15 78.2,32.125 v2(83.05,32.125) 84.875,30.3 84.875,27.4 85.169,27.106 85.413,27.106 85.475,27.044 J7.10@85.475,27
  Bottom Layer w0.152: R163.1@82.35,32.2 82.425,32.125 v2(83.05,32.125)
SOC_I2C1_SDA: J7.12 R162.1 U8.B16 | length 38.7
  Top Layer w0.152: U8.B16@76.106,52.321 75.555,52.321 75.158,51.925 73.625,51.925 72.925,51.225 72.925,49.05 73.75,48.225 73.75,45.075 72.172,43.497 72.172,36.803 73.025,35.95 73.825,35.95 77.925,31.85 82.357,31.85 83.05,31.157 v2(83.05,31.075) 83.083,31.042 83.358,31.042 84.375,30.025 84.375,27.3 84.211,27.136 83.646,27.136 J7.12@83.435,26.925
  Bottom Layer w0.152: R162.1@82.35,31.125 82.4,31.075 v2(83.05,31.075)
SOC_KALDO_ENN: R15.2 U8.B4 | length 4.3
  Top Layer w0.169: R15.2@81.475,41.775 81.975,42.275 81.975,44.046 82.895,44.965 U8.B4@82.895,45.533
SOC_LED1_D: R164.1 U26.3 | length 3.1
  Bottom Layer w0.152: U26.3@144.472,56.148 144.472,56.412 U26.3@144.685,56.625
  Bottom Layer w0.203: U26.3@144.685,56.625 R164.1@147.25,56.625
SOC_LED1_G: R165.1 U8.D17 U26.1 | length 148.5
  Top Layer w0.169: v2(76.1,54.025) 76.103,54.022 76.746,54.022 U8.D17@76.75,54.025
  MidLayer2SIG w0.169: 75.3,54.825 v2(76.1,54.025)
  MidLayer2SIG w0.203: 75.3,54.825 71,54.825 70.65,55.175 68.925,55.175 68.6,54.85 57.85,54.85 56.625,53.625 55.104,53.625 54.579,54.15 53.25,54.15 49.075,49.975 49.075,44.8 55.05,38.825 73.675,38.825 74.55,37.95 74.55,35.3 75.2,34.65 94.95,34.65 99.625,39.325 108.45,39.325 109.7,38.075 114.825,38.075 127.45,50.7 v1(145.175,50.7)
  Bottom Layer w0.152: R165.1@145.125,51.625 R165.1@145.225,51.725
  Bottom Layer w0.203: v1@145.125,50.725 R165.1@145.125,51.675 ; R165.1@145.225,51.725 145.225,52.4 145.422,52.597 U26.1@145.422,53.638
SOC_LED1_K: LED6.2 R164.2 | length 3
  Top Layer w0.152: v1@149.775,56.6 v1@149.8,56.575 ; LED6.2@150.975,57.126 LED6.2@151.025,57.176
  Top Layer w0.203: v1@149.8,56.575 150.886,56.575 150.975,56.664 LED6.2@150.975,57.126
  Bottom Layer w0.152: R164.2@148.55,56.65 R164.2@148.6,56.6 ; v1@149.725,56.6 v1@149.775,56.65
  Bottom Layer w0.203: R164.2@148.6,56.6 v1@149.725,56.6
  other v1: 149.8,56.6
SOC_MII_COL: R155.2 U8.H16 | length 29.3
  Top Layer w0.169: v5(78.925,55.725) 78.93,55.72 79.496,55.72 U8.H16@79.501,55.715
  Bottom Layer w0.169: R155.2@62.875,68.6 62.958,68.517 62.958,67.888 62.958,67.804 63.127,67.634 63.502,67.634 63.671,67.465 63.671,67.126 63.502,66.957 62.486,66.957 62.317,66.788 62.317,66.449 62.486,66.28 63.502,66.28 63.671,66.111 63.671,65.772 63.502,65.603 62.7,65.603 62.531,65.433 62.531,65.095 62.7,64.925 63.267,64.925 63.436,64.756 63.436,64.417 63.267,64.248 63.098,64.079 63.098,63.74 63.267,63.571 63.458,63.571 63.627,63.401 63.627,63.241 63.627,63.223 71.125,55.725 v5(78.925,55.725)
SOC_MII_CRS: R154.2 U8.H17 | length 31.7
  Top Layer w0.169: R154.2@60.4,65.7 60.4,61.55 60.75,61.2 60.949,61.001 61.098,61.001 61.243,61.146 61.392,61.146 61.542,60.996 61.542,60.846 61.174,60.479 61.174,60.329 61.324,60.179 61.474,60.179 61.92,60.625 62.069,60.625 62.219,60.476 62.219,60.326 61.773,59.88 61.773,59.73 61.923,59.581 62.072,59.581 62.518,60.027 62.668,60.027 62.817,59.877 62.817,59.727 62.372,59.281 62.372,59.132 62.521,58.982 62.671,58.982 63.117,59.428 63.266,59.428 63.416,59.278 63.416,59.129 62.97,58.683 62.97,58.533 63.12,58.383 63.269,58.383 63.715,58.829 63.865,58.829 64.015,58.68 64.015,58.53 63.569,58.084 63.569,57.934 63.718,57.785 63.868,57.785 63.942,57.859 64.091,57.859 64.151,57.799 64.55,57.4 77.252,57.4 78.371,56.281 U8.H17@78.935,56.281
SOC_MII_RXCLK: R156.2 U8.L18 | length 21.8
  Top Layer w0.169: R156.2@72.45,65.7 72.45,64.65 72.65,64.45 72.71,64.39 72.95,64.15 73.249,64.15 73.418,63.981 73.418,63.741 72.893,63.216 72.893,62.976 73.132,62.737 73.371,62.737 74.691,64.057 74.931,64.057 75.17,63.817 75.17,63.578 73.724,62.131 73.724,61.892 73.963,61.652 74.202,61.652 75.649,63.099 75.888,63.099 76.128,62.859 76.128,62.62 74.915,61.407 74.915,61.167 75.154,60.928 75.394,60.928 76.563,62.097 76.803,62.097 76.862,62.037 80.042,58.858 80.042,58.568 U8.L18@80.066,58.544
SOC_MII_RXD0: R144.2 U8.M16 | length 21.4
  Top Layer w0.169: U8.M16@81.75,57.959 81.757,57.966 81.757,58.368 v2@81.75,58.375 ; U8.M16@81.77,57.954 81.77,58.368 v2@81.77,58.52
  Bottom Layer w0.169: R144.2@71.5,68.6 71.5,67.502 71.5,67.205 71.331,67.036 71.161,66.867 71.161,66.528 71.331,66.359 71.897,66.359 72.066,66.189 72.066,65.851 71.897,65.681 70.89,65.681 70.721,65.512 70.721,65.173 70.89,65.004 71.331,65.004 71.5,64.835 71.5,64.75 71.5,62.875 75.625,58.75 81.532,58.75 81.757,58.525 v2(81.775,58.525)
SOC_MII_RXD1: R145.2 U8.L15 | length 25.4
  Top Layer w0.169: U8.L15@81.745,56.804 v2@81.745,57.37
  Bottom Layer w0.169: R145.2@73.175,68.55 73.175,68.3 73.175,67.642 73.006,67.472 72.936,67.472 72.766,67.303 72.766,66.964 72.936,66.795 73.768,66.795 73.938,66.626 73.938,66.287 73.768,66.118 72.936,66.118 72.766,65.948 72.766,65.61 72.936,65.44 73.768,65.44 73.938,65.271 73.938,64.932 73.768,64.763 72.936,64.763 72.766,64.594 72.766,64.255 72.936,64.086 73.768,64.086 73.938,63.917 73.938,63.578 73.768,63.409 72.936,63.409 72.766,63.239 72.766,62.901 72.936,62.731 73.006,62.731 73.175,62.562 73.175,62.125 74.008,61.292 76.1,59.2 81.9,59.2 82.275,58.825 82.275,58.25 81.75,57.725 v2(81.75,57.375)
SOC_MII_RXD2: R146.2 U8.L16 | length 26.4
  Top Layer w0.169: U8.L16@81.195,57.429 81.199,57.433 81.199,57.974 v2(81.2,57.975)
  Bottom Layer w0.169: R146.2@69.75,68.6 69.75,63.913 69.75,63.42 69.739,63.409 69.739,63.17 69.978,62.93 70.218,62.93 70.337,63.05 70.577,63.05 70.816,62.81 70.816,62.571 70.426,62.181 70.426,61.941 70.665,61.702 70.905,61.702 71.295,62.092 71.535,62.092 71.774,61.853 71.774,61.613 71.384,61.223 71.384,60.983 71.623,60.744 71.863,60.744 72.253,61.134 72.493,61.134 72.732,60.895 72.732,60.655 72.342,60.265 72.342,60.025 72.581,59.786 72.82,59.786 73.211,60.176 73.45,60.176 73.69,59.937 73.69,59.698 73.299,59.307 73.299,59.068 73.539,58.828 73.778,58.828 74.169,59.219 74.408,59.219 74.648,58.979 74.648,58.74 74.257,58.349 74.257,58.11 74.497,57.87 74.736,57.87 74.913,58.047 75.153,58.047 75.213,57.987 75.225,57.975 v2(81.2,57.975)
SOC_MII_RXD3: R147.2 U8.L17 | length 21
  Top Layer w0.169: R147.2@70.729,65.7 70.729,64.562 70.729,63.552 70.245,63.068 70.245,62.829 70.484,62.589 70.724,62.589 71.541,63.407 71.781,63.407 72.02,63.167 72.02,62.928 71.203,62.11 71.203,61.871 71.442,61.631 71.681,61.631 72.499,62.449 72.739,62.449 72.978,62.21 72.978,61.97 72.16,61.152 72.16,60.913 72.4,60.674 72.639,60.674 73.001,61.035 73.24,61.035 73.3,60.975 73.725,60.55 77.496,60.55 80.068,57.978 U8.L17@80.632,57.978
SOC_MII_RXDV: R157.2 U8.J17 | length 22.7
  Top Layer w0.169: R157.2@63.843,65.7 63.843,61.432 64.025,61.25 64.309,60.966 64.309,60.726 64.094,60.511 64.094,60.272 64.334,60.033 64.573,60.033 64.788,60.247 65.028,60.247 65.088,60.188 66.775,58.5 77.284,58.5 78.937,56.847 U8.J17@79.501,56.847